# Altium PCB TPcape_basic.PcbDoc
Units mil, origin at the board's own origin, x right, y up, seen from the top; angles counter-clockwise.
Board outline 6000 x 4000 mil, 2 copper layers (Top Layer, Bottom Layer); 87 components, 99 nets, 432 pads, 8 vias.
Unrouted connection lines stored in the file: 245.
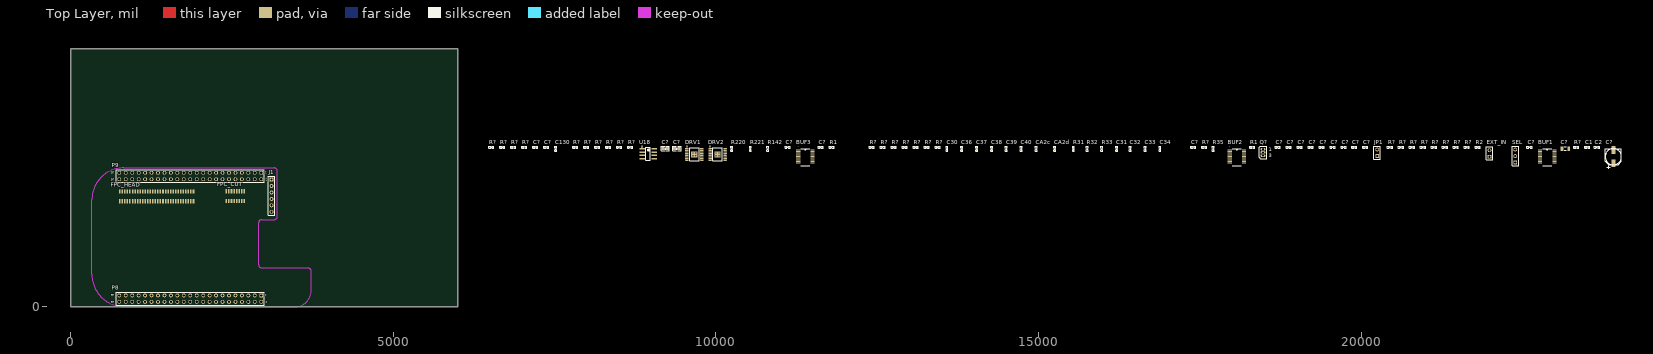
[diagram p0: Top Layer view]
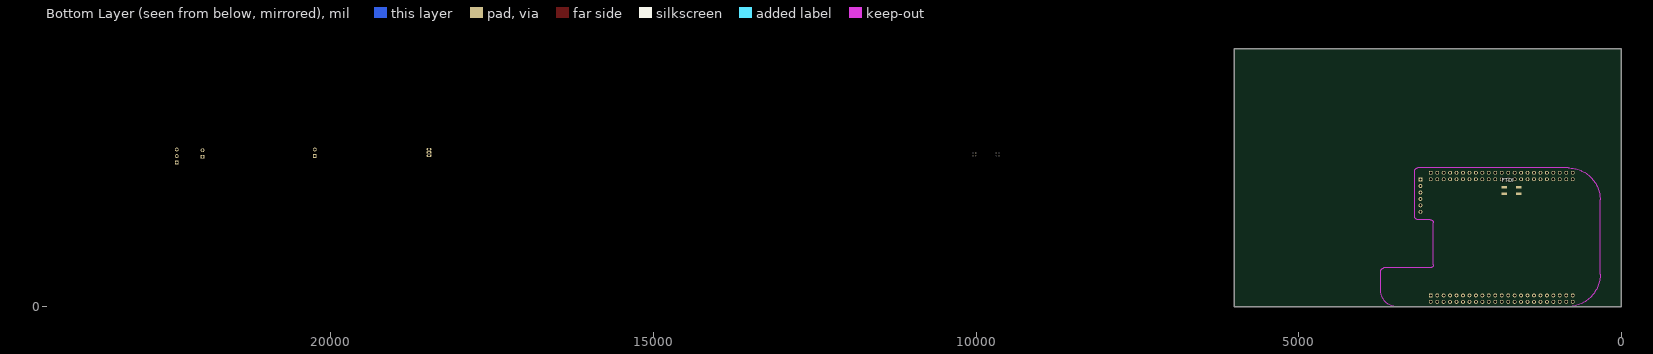
[diagram p1: Bottom Layer view, seen from below]

## Layer stack, top to bottom
Top Solder: solder mask 0.4, Solder Resist, Dk 3.5
Top Layer: signal copper 1.4
Dielectric1: dielectric 12.6, FR-4, Dk 4.8
Bottom Layer: signal copper 1.4
Bottom Solder: solder mask 0.4, Solder Resist, Dk 3.5

## Board outline
0,0 6000,0 6000,4000 0,4000

## Design rules (kind name [scope] priority, off if disabled: settings)
Clearance [All] p1: gap=10
PolygonConnect [All] p1: connectstyle=Relief reliefconductorwidth=10 reliefentries=4 polygonreliefangle="90 Angle" airgapwidth=10
RoomDefinition TPcape_basic [InComponentClass('TPcape_basic')] p1: confinementstyle=ConfineIn formatcopy=TRUE lockcomponents=FALSE outline -555,-145 24825,-145 24825,4345 -555,4345
RoutingVias [All] p1: holewidth=28 width=50 viastyle="Through Hole" minholewidth=28 minwidth=50 maxholewidth=28 maxwidth=50
SilkToSolderMaskClearance SilkscreenOverComponentPads [IsPad] p1: minsilkscreentomaskgap=10 clearancetoexposedcopper=TRUE
SolderMaskExpansion [All] p1: expansion=4
UnpouredPolygon [All] p1: allowunpoured=FALSE
Width [All] p1: maxlimit=10 minlimit=10 preferedwidth=10
28 further rules are at their usual default settings.

## Classes and differential pairs
component class TPcape_basic: BUF1 BUF2 BUF3 C1 C2 C30 C31 C32 C33 C34 C36 C37 C38 C39 C40 C130 C? CA2c CA2d DRV1 DRV2 EXT_IN FPC_CUT FPC_HEAD FTDI J1 JP1 P8 P9 Q? R1 R2 R31 R32 R33 R35 R142 R220 R221 R? SEL U18

## Components (designator, comment, footprint, x,y, rotation, side; value= is the part's Value field where it differs from the comment)
BUF1 "SN74LVC244A_PW_2" PW20 22880,2315 r0 top
BUF2 "SN74LVC244A_PW_2" PW20 18070,2315 r0 top
BUF3 "SN74LVC244A_PW_2" PW20 11385,2315 r0 top
C1 "0.1uF, 16V" 402 23500,2470 r0 top
C2 "0.1uF, 16V" 402 23650,2470 r0 top
C30 "No Comment" 402 13580,2445 r90 top
C31 "No Comment" 402 16210,2445 r90 top
C32 "No Comment" 402 16420,2445 r90 top
C33 "No Comment" 402 16650,2445 r90 top
C34 "No Comment" 402 16880,2445 r90 top
C36 "No Comment" 402 13810,2445 r90 top
C37 "No Comment" 402 14040,2445 r90 top
C38 "No Comment" 402 14270,2445 r90 top
C39 "No Comment" 402 14500,2445 r90 top
C40 "No Comment" 402 14730,2445 r90 top
C130 "0.1uF" 402 7515,2445 r90 top
C? "1000pF" 402 19385,2470 r0 top
C? "47uF" C1206 23160,2450 r0 top
C? "100uF" RD205SMD_250D 23905,2325 r90 top
C? "2.2uF, 6.3V" 402 7200,2470 r0 top
C? "10uF, 10V" 805 9215,2450 r0 top
C? "2.2uF, 6.3V" 402 7370,2470 r0 top
C? "10uF, 10V" 805 9395,2450 r0 top
C? "0.1uF" 402 22605,2470 r0 top
C? "0.1uF" 402 17395,2470 r0 top
C? "0.1uF" 402 11110,2470 r0 top
C? "1000pF" 402 19555,2470 r0 top
C? "1000pF" 402 19725,2470 r0 top
C? "1000pF" 402 19890,2470 r0 top
C? "1000pF" 402 20060,2470 r0 top
C? "1000pF" 402 18705,2470 r0 top
C? "1000pF" 402 18875,2470 r0 top
C? "1000pF" 402 19045,2470 r0 top
C? "1000pF" 402 19215,2470 r0 top
C? "0.1uF, 16V" 402 11625,2470 r0 top
CA2c "No Comment" 402 14960,2445 r90 top
CA2d "No Comment" 402 15250,2445 r90 top
DRV1 "DRV8833CPWPR" DRV8833CPWPR 9665,2360 r0 top
DRV2 "DRV8833CPWPR" DRV8833CPWPR 10025,2360 r0 top
EXT_IN "Header 2" HDR1X2 21985,2325 r90 top
FPC_CUT "Molex 52610-0872" "Molex 52610-0872" 2415,1640 r0 top
FPC_HEAD "Molex 52610-3072" "Molex 52610-3072" 1905,1785 r180 top
FTDI "Header 2X2" SSM-102-S-DV 1815,1850 r270 bottom
J1 "Header 6" HDR1X6 3115,1970 r270 top
JP1 "Header 2" HDR1X2 20245,2335 r90 top
P8 "FEMALE HEADER 2x23" HDR2x23 1855,125 r180 top
P9 "FEMALE HEADER 2x23" HDR2X23 1855,2025 r180 top
Q? "MOSFET-N" E3 18475,2390 r0 top
R1 "0" 402 18310,2470 r0 top
R1 "0" 402 11795,2470 r0 top
R2 "0" 402 21805,2470 r0 top
R31 "10k, 1%" 402 15540,2445 r90 top
R32 "10k, 1%" 402 15750,2445 r90 top
R33 "10k, 1%" 402 15980,2445 r90 top
R35 "10k, 1%" 402 17705,2445 r90 top
R142 "4.75k" 402 10805,2445 r90 top
R220 "5.6k" 402 10245,2445 r90 top
R221 "5.6k" 402 10535,2445 r90 top
R? "10k" 402 12415,2470 r0 top
R? "10k" 402 7990,2470 r0 top
R? "10k" 402 7820,2470 r0 top
R? "0.2" 402 6690,2470 r0 top
R? "0.2" 402 6520,2470 r0 top
R? "10k" 402 8330,2470 r0 top
R? "20k" 402 8160,2470 r0 top
R? "0.2" 402 7030,2470 r0 top
R? "0.2" 402 6860,2470 r0 top
R? "10k" 402 8670,2470 r0 top
R? "20k" 402 8500,2470 r0 top
R? "10k" 402 23330,2470 r0 top
R? "10k" 402 21635,2470 r0 top
R? "10k" 402 21465,2470 r0 top
R? "10k" 402 21295,2470 r0 top
R? "10k" 402 21125,2470 r0 top
R? "10k" 402 20955,2470 r0 top
R? "10k" 402 20785,2470 r0 top
R? "10k" 402 20615,2470 r0 top
R? "10k" 402 20445,2470 r0 top
R? "10k" 402 13435,2470 r0 top
R? "10k" 402 17565,2470 r0 top
R? "10k" 402 13265,2470 r0 top
R? "10k" 402 13095,2470 r0 top
R? "10k" 402 12925,2470 r0 top
R? "10k" 402 12755,2470 r0 top
R? "10k" 402 12585,2470 r0 top
SEL "Header 3" HDR1X3 22385,2235 r90 top
U18 "CAT24C256WI-GT3" CAT24C256WI-GT3 8950,2370 r0 top

## Footprints (in the part's own frame and the unit in brackets; to place one, negate y for a bottom-side part, rotate by r counter-clockwise, add the part's x,y. Pads: shape width x height; smd on the part's side, far side on the other; paste and mask are expansions set on the pad)
402 [mil] "402"
  rect 25x20 smd mask+2: 1(-20,0) 2(20,0)
  silkscreen extent -40,-15 40,15
805 [mil] "805"
  rect 45x50 smd mask+2: 1(-35,0) 2(35,0)
  silkscreen extent -65,-35 65,35
C1206 [mm] "Chip Capacitor, Body 3.2x1.6mm, IPC High Density"
  rect 1.1x1.7 smd: 1(-1.35,0) 2(1.35,0)
  silkscreen extent -0.4,-0.75 0.4,0.75, body extent -1.7,-0.9 1.7,0.9, height 1.3
CAT24C256WI-GT3 [mm] "IC EEPROM 256KBIT 400KHZ 8SOIC"
  rect 2.2x0.6 smd: 1(-2.4,1.905) 2(-2.4,0.635) 3(-2.4,-0.635) 4(-2.4,-1.905) 5(2.4,-1.905) 6(2.4,-0.635) 7(2.4,0.635) 8(2.4,1.905)
  silkscreen extent -2.52,-2.5 0.9,2.88, body extent -2,-2.5 2,2.5, height 1.75
DRV8833CPWPR [mm] "HTSSOP (PWP) for DRV8833C 1A Low Voltage Stepper or Single/Dual Brushed DC Motor Driver (PWM Ctrl)"
  oval 1.4x0.45 smd: 1(-2.95,2.275) 2(-2.95,1.625) 3(-2.95,0.975) 4(-2.95,0.325) 5(-2.95,-0.325) 6(-2.95,-0.975) 7(-2.95,-1.625) 8(-2.95,-2.275) 9(2.95,-2.275) 10(2.95,-1.625) 11(2.95,-0.975) 12(2.95,-0.325) 13(2.95,0.325) 14(2.95,0.975) 15(2.95,1.625) 16(2.95,2.275)
  rect 2.46x2.31 smd: 17(0,0)
  silkscreen extent -3.07,-2.55 1.85,3.17, body extent -3.21,-2.5 3.21,2.5, height 0.99
E3 [mm] "TO, Flat Index; 3 In-Line, Axial Leads; Body Dia. 4.6mm; Lead Dia. 0.5 mm (max)"
  oval 2x1 hole 0.8: 1(0,1.27) 2(0,0) 3(0,-1.27)
  silkscreen extent -1.41,-2.41 1.41,2.41
HDR1X2 [mm] "Connector; Header; 2 Position"
  rect 1.5x1.5 hole 0.9: 1(0,0)
  round 1.5 hole 0.9: 2(2.54,0)
  silkscreen extent -1.27,-1.27 3.81,1.27
HDR1X3 [mm] "Connector; Header; 3 Position"
  rect 1.5x1.5 hole 0.9: 1(0,0)
  round 1.5 hole 0.9: 2(2.54,0) 3(5.08,0)
  silkscreen extent -1.27,-1.27 6.35,1.27
HDR1X6 [mm] "Connector; Header; 6 Position"
  rect 1.5x1.5 hole 0.9: 1(0,0)
  round 1.5 hole 0.9: 2(2.54,0) 3(5.08,0) 4(7.62,0) 5(10.16,0) 6(12.7,0)
  silkscreen extent -1.27,-1.27 13.97,1.27
HDR2x23 [mm]
  rect 1.5x1.5 hole 0.9: 1(-27.94,-1.27)
  round 1.5 hole 0.9: 2(-27.94,1.27) 3(-25.4,-1.27) 4(-25.4,1.27) 5(-22.86,-1.27) 6(-22.86,1.27) 7(-20.32,-1.27) 8(-20.32,1.27) 9(-17.78,-1.27) 10(-17.78,1.27) 11(-15.24,-1.27) 12(-15.24,1.27) 13(-12.7,-1.27) 14(-12.7,1.27) 15(-10.16,-1.27) 16(-10.16,1.27) 17(-7.62,-1.27) 18(-7.62,1.27) 19(-5.08,-1.27) 20(-5.08,1.27) 21(-2.54,-1.27) 22(-2.54,1.27) 23(0,-1.27) 24(0,1.27) 25(2.54,-1.27) 26(2.54,1.27) 27(5.08,-1.27) 28(5.08,1.27) 29(7.62,-1.27) 30(7.62,1.27) 31(10.16,-1.27) 32(10.16,1.27) 33(12.7,-1.27) 34(12.7,1.27) 35(15.24,-1.27) 36(15.24,1.27) 37(17.78,-1.27) 38(17.78,1.27) 39(20.32,-1.27) 40(20.32,1.27) 41(22.86,-1.27) 42(22.86,1.27) 43(25.4,-1.27) 44(25.4,1.27) 45(27.94,-1.27) 46(27.94,1.27)
  silkscreen extent -29.21,-2.54 29.21,2.54
HDR2X23 [mm]
  rect 1.5x1.5 hole 0.9: 1(-27.94,-1.27)
  round 1.5 hole 0.9: 2(-27.94,1.27) 3(-25.4,-1.27) 4(-25.4,1.27) 5(-22.86,-1.27) 6(-22.86,1.27) 7(-20.32,-1.27) 8(-20.32,1.27) 9(-17.78,-1.27) 10(-17.78,1.27) 11(-15.24,-1.27) 12(-15.24,1.27) 13(-12.7,-1.27) 14(-12.7,1.27) 15(-10.16,-1.27) 16(-10.16,1.27) 17(-7.62,-1.27) 18(-7.62,1.27) 19(-5.08,-1.27) 20(-5.08,1.27) 21(-2.54,-1.27) 22(-2.54,1.27) 23(0,-1.27) 24(0,1.27) 25(2.54,-1.27) 26(2.54,1.27) 27(5.08,-1.27) 28(5.08,1.27) 29(7.62,-1.27) 30(7.62,1.27) 31(10.16,-1.27) 32(10.16,1.27) 33(12.7,-1.27) 34(12.7,1.27) 35(15.24,-1.27) 36(15.24,1.27) 37(17.78,-1.27) 38(17.78,1.27) 39(20.32,-1.27) 40(20.32,1.27) 41(22.86,-1.27) 42(22.86,1.27) 43(25.4,-1.27) 44(25.4,1.27) 45(27.94,-1.27) 46(27.94,1.27)
  silkscreen extent -29.21,-2.54 29.21,2.54
"Molex 52610-0872" [mm] "FPC connector for Fujitsu FTP-628MCL401 (Molex 52610-0871 is obsolete)"
  rect 0.6x1.65 smd: 1(0,0) 1(0,3.8) 2(1,0) 2(1,3.8) 3(2,0) 3(2,3.8) 4(3,0) 4(3,3.8) 5(4,0) 5(4,3.8) 6(5,0) 6(5,3.8) 7(6,0) 7(6,3.8) 8(7,0) 8(7,3.8)
  body extent -3.81,-0.34 10.79,4.15, height 5.7
"Molex 52610-3072" [mm] "FPC connector for Fujitsu FTP-628MCL401 print head (Molex 52610-3071 is obsolete)"
  rect 0.6x1.65 smd: 1(0,3.8) 1(0,0) 2(1,3.8) 2(1,0) 3(2,3.8) 3(2,0) 4(3,3.8) 4(3,0) 5(4,3.8) 5(4,0) 6(5,3.8) 6(5,0) 7(6,3.8) 7(6,0) 8(7,0) 8(7,3.8) 9(8,0) 9(8,3.8) 10(9,0) 10(9,3.8) 11(10,0) 11(10,3.8) 12(11,0) 12(11,3.8) 13(12,0) 13(12,3.8) 14(13,0) 14(13,3.8) 15(14,0) 15(14,3.8) 16(15,0) 16(15,3.8) 17(16,0) 17(16,3.8) 18(17,0) 18(17,3.8) 19(18,0) 19(18,3.8) 20(19,0) 20(19,3.8) 21(20,0) 21(20,3.8) 22(21,0) 22(21,3.8) 23(22,0) 23(22,3.8) 24(23,0) 24(23,3.8) 25(24,0) 25(24,3.8) 26(25,0) 26(25,3.8) 27(26,0) 27(26,3.8) 28(27,0) 28(27,3.8) 29(28,0) 29(28,3.8) 30(29,0) 30(29,3.8)
  body extent -3.8,-0.45 32.8,4.05, height 5.7
PW20 [mil]
  rect 66x14 smd: 1(-111,115.16) 2(-111,89.57) 3(-111,63.98) 4(-111,38.39) 5(-111,12.8) 6(-111,-12.8) 7(-111,-38.39) 8(-111,-63.98) 9(-111,-89.57) 10(-111,-115.16) 11(111,-115.16) 12(111,-89.57) 13(111,-63.98) 14(111,-38.39) 15(111,-12.8) 16(111,12.8) 17(111,38.39) 18(111,63.98) 19(111,89.57) 20(111,115.16)
  silkscreen extent -68,-130 68,130, body extent -126,-128 126,128, height 38
RD205SMD_250D [mil] "RD205SMD_250D"
  rect 120x65 smd mask+2: 1(-102.5,0) 2(102.5,0)
  silkscreen extent -188,-125 125,125
SSM-102-S-DV [mm] "4-pin 0.1\" recepticle, surface mount for FTDI"
  rect 1.02x2.22 smd: 1(0,0) 2(0,5.65) 3(2.54,0) 4(2.54,5.65)
  body extent -1.27,-0.67 3.81,6.36, height 7.37

## Part data
BUF1 BUF2 BUF3 DRV1 DRV2: "Imported"
C1 C2 C30 C31 C32 C33 C34 C36 C37 C38 C39 C40 C130 C? C? C? C? C? C? C? C? C? C? C? C? C? C? C? CA2c CA2d: library part "CAP SMD", "No Description"
C?: library part "Cap Semi", "Capacitor (Semiconductor SIM Model)"
C?: library part "CAP SMD", "Bulk capacitor for motor drive"
C? C?: library part "CAP SMD", "Low-ESR ceramic bypass capacitor"
EXT_IN JP1: "Header, 2-Pin"
FPC_CUT: "FPC connector for Fujitsu FTP-628MCL401 (Molex 52610-0871 is obsolete)"
FPC_HEAD: "FPC connector for Fujitsu FTP-628MCL401 print head (Molex 52610-3071 is obsolete)"
FTDI: "Header, 2-Pin, Dual row"
J1: "Header, 6-Pin"
P8 P9: library part HDR_46_F_2_0.1_0.1, "CONN HEADER FMAL 46PS.1\" DL GOLD"
Q?: "N-Channel MOSFET"
R1 R1 R2 R31 R32 R33 R35 R? R? R? R? R? R? R? R? R? R? R? R? R? R? R? R? R? R? R? R? R? R? R? R? R? R? R?: library part "RES SMD", "RES 10K OHM 1/16W 5% 0402 SMD"
R142 R220 R221: library part "RES SMD", "RES 5.6K OHM 1/16W 5% 0402 SMD"
SEL: "Header, 3-Pin"
U18: "IC EEPROM 256KBIT 400KHZ 8SOIC"

## Via types
v1: diameter 19.68, hole 7.87, Top Layer to Bottom Layer, 8 vias

## Nets (pads, with @x,y where several pads share a name; then routed paths per layer and width w, separated by ;. In a path a pad name is that pad's centre, name@x,y a point inside that pad or via, vN(x,y) a via of type N, cw(c..) or ccw(c..) an arc to the next point about the centre after c; other vN are vias at no path point)
AIN0: P9.39
AIN1: P9.40
AIN2: P9.37
AIN3: P9.38
AIN4: P9.33
AIN5: P9.36
AIN6: P9.35
B_UART0_RX: FTDI.1 FTDI.3 J1.4
B_UART0_TX: FTDI.2 FTDI.4 J1.5
CLOCK: BUF3.16 C?.2@18725,2470 FPC_HEAD.7 R?.1@7970,2470
DATA_IN: BUF3.18 C?.2@18895,2470 FPC_HEAD.6 R?.1@7800,2470
DATA_OUT: BUF2.17 R2.1
EXT_PWR: EXT_IN.1 SEL.3
FAULTN_CUT: BUF3.8 DRV2.8 R?.2@8690,2470
FAULTN_HEAD: BUF3.6 DRV1.8 R?.2@8350,2470
GND: BUF1.10 BUF2.10 BUF3.10 BUF3.11 BUF3.13 BUF3.15 BUF3.17 C1.1 C2.1 C130.2 C?.1@9180,2450 C?.1@9360,2450 C?.1@11090,2470 C?.1@11605,2470 C?.1@17375,2470 C?.1@18685,2470 C?.1@18855,2470 C?.1@19025,2470 C?.1@19195,2470 C?.1@19365,2470 C?.1@19535,2470 C?.1@19705,2470 C?.1@19870,2470 C?.1@20040,2470 C?.1@22585,2470 C?.1@23106.85,2450 C?.1@23905,2222.5 C?.2@7220,2470 C?.2@7390,2470 DRV1.13 DRV1.17 DRV2.13 DRV2.17 EXT_IN.2 FPC_HEAD.8 FPC_HEAD.9 FPC_HEAD.19 FPC_HEAD.20 J1.1 P8.1 P8.2 P9.1 P9.2 P9.43 P9.44 P9.45 P9.46 R35.2 R?.2@6540,2470 R?.2@6710,2470 R?.2@6880,2470 R?.2@7050,2470 R?.2@7840,2470 R?.2@8010,2470 R?.2@12435,2470 R?.2@12605,2470 R?.2@12775,2470 R?.2@12945,2470 R?.2@13115,2470 R?.2@13285,2470 R?.2@13455,2470 R?.2@20465,2470 R?.2@20635,2470 R?.2@20805,2470 R?.2@20975,2470 R?.2@21145,2470 R?.2@21315,2470 R?.2@21485,2470 R?.2@21655,2470 U18.1 U18.2 U18.4
  other v1: 9643.35,2338.35 9686.65,2338.35 10003.35,2338.35 10046.65,2338.35 9643.35,2381.65 9686.65,2381.65 10003.35,2381.65 10046.65,2381.65
GNDA_ADC: P9.34
I2C2_SCL: P9.19 R220.1 U18.6
I2C2_SDA: P9.20 R221.1 U18.5
LATCHN: BUF2.5 C?.2@19065,2470 FPC_HEAD.21 R?.2@17585,2470
LCD_AC_BIAS_EN: P8.30
LCD_DATA8: P8.37
LCD_DATA9: P8.38
LCD_DATA10: P8.36
LCD_DATA11: P8.34
LCD_DATA12: P8.35
LCD_DATA13: P8.33
LCD_DATA14: P8.31
LCD_DATA15: P8.32
LCD_HSYNC: P8.29
LCD_PCLK: P8.28
LCD_VSYNC: P8.27
MTA_1: BUF1.18 DRV1.16 R?.1@20425,2470
MTA_2: BUF1.9 DRV2.16 R?.1@21105,2470
MTA_CUT: DRV2.2 FPC_CUT.4
MTA_HEAD: DRV1.2 FPC_HEAD.28
MTAN_1: BUF1.16 DRV1.15 R?.1@20595,2470
MTAN_2: BUF1.7 DRV2.15 R?.1@21275,2470
MTAN_CUT: DRV2.4 FPC_CUT.5
MTAN_HEAD: DRV1.4 FPC_HEAD.27
MTB_1: BUF1.14 DRV1.9 R?.1@20765,2470
MTB_2: BUF1.5 DRV2.9 R?.1@21445,2470
MTB_CUT: DRV2.7 FPC_CUT.6
MTB_HEAD: DRV1.7 FPC_HEAD.30
MTBN_1: BUF1.12 DRV1.10 R?.1@20935,2470
MTBN_2: BUF1.3 DRV2.10 R?.1@21615,2470
MTBN_CUT: DRV2.5 FPC_CUT.7
MTBN_HEAD: DRV1.5 FPC_HEAD.29
NetC?_1: C?.1@7350,2470 DRV2.14
NetDRV1_1: DRV1.1 R?.2@8180,2470
NetDRV1_3: DRV1.3 R?.1@6500,2470
NetDRV1_6: DRV1.6 R?.1@6670,2470
NetDRV2_1: DRV2.1 R?.2@8520,2470
NetDRV2_3: DRV2.3 R?.1@6840,2470
NetDRV2_6: DRV2.6 R?.1@7010,2470
NetFPC_CUT_1: FPC_CUT.1 R1.1@11775,2470
NetFPC_HEAD_1: FPC_HEAD.1 R35.1
NetFPC_HEAD_2: FPC_HEAD.2 R1.1@18290,2470
NetFPC_HEAD_22: FPC_HEAD.22 R2.2
NetR142_1: R142.1 U18.3
PRU0_R30_0: BUF2.2 P9.31
PRU0_R30_1: BUF2.4 P9.29
PRU0_R30_2: BUF2.6 P9.30
PRU0_R30_3: BUF2.8 P9.28
PRU0_R30_4: BUF2.11 P9.42
PRU0_R30_5: BUF2.13 P9.27
PRU0_R30_6: BUF3.2
PRU0_R30_7: BUF2.15 P9.25
PRU0_R30_14: BUF3.4 P8.12
PRU0_R31_15: BUF3.9 P8.15
PRU0_R31_16: BUF2.3 P9.24 R?.1@13415,2470
PRU1_R30_0: BUF1.2 P8.45
PRU1_R30_1: BUF1.4 P8.46
PRU1_R30_2: BUF1.6 P8.43
PRU1_R30_3: BUF1.8 P8.44
PRU1_R30_4: BUF1.11 P8.41
PRU1_R30_5: BUF1.13 P8.42
PRU1_R30_6: BUF1.15 P8.39
PRU1_R30_7: BUF1.17 P8.40
PRU1_R30_12: BUF1.1 BUF1.19 BUF2.1 BUF2.19 BUF3.1 BUF3.19 P8.21 R?.2@23350,2470
PRU1_R31_13: BUF3.14 P8.20
PRU1_R31_16: BUF3.12 P9.26
STROBE1: BUF2.18 C?.2@19235,2470 FPC_HEAD.18 R?.1@12395,2470
STROBE2: BUF2.16 C?.2@19405,2470 FPC_HEAD.17 R?.1@12565,2470
STROBE3: BUF2.14 C?.2@19575,2470 FPC_HEAD.16 R?.1@12735,2470
STROBE4: BUF2.12 C?.2@19745,2470 FPC_HEAD.12 R?.1@12905,2470
STROBE5: BUF2.9 C?.2@19910,2470 FPC_HEAD.11 R?.1@13075,2470
STROBE6: BUF2.7 C?.2@20080,2470 FPC_HEAD.10 R?.1@13245,2470
SW: FPC_HEAD.26
SWN: FPC_HEAD.25
SYS_RESETN: P9.10
TIMER4: P8.7
TM_1: FPC_HEAD.14
TM_2: FPC_HEAD.15
VCC: R?.1@8310,2470 R?.1@8650,2470
VDD: C2.2 C?.2@11645,2470 C?.2@23213.15,2450 FPC_HEAD.13 R1.2
VDD_3V3: BUF1.20 BUF2.20 BUF3.20 C130.1 C?.2@11130,2470 C?.2@17415,2470 C?.2@22625,2470 P9.3 P9.4 R142.2 R220.2 R221.2 R?.1@17545,2470 R?.1@23310,2470 U18.8
VDD_5V: P9.5 P9.6 SEL.1
VH: C1.2 C?.2@9250,2450 C?.2@9430,2450 C?.2@23905,2427.5 DRV1.12 DRV2.12 FPC_HEAD.4 FPC_HEAD.5 FPC_HEAD.23 FPC_HEAD.24 Q?.1 R?.1@8140,2470 R?.1@8480,2470 SEL.2
pads on no net: BUF3.3 BUF3.5 BUF3.7 C30.1 C30.2 C31.1 C31.2 C32.1 C32.2 C33.1 C33.2 C34.1 C34.2 C36.1 C36.2 C37.1 C37.2 C38.1 C38.2 C39.1 C39.2 C40.1 C40.2 C?.1@7180,2470 CA2c.1 CA2c.2 CA2d.1 CA2d.2 DRV1.11 DRV1.14 DRV2.11 FPC_CUT.2 FPC_CUT.3 FPC_CUT.8 FPC_HEAD.3 J1.2 J1.3 J1.6 JP1.1 JP1.2 P8.3 P8.4 P8.5 P8.6 P8.8 P8.9 P8.10 P8.11 P8.13 P8.14 P8.16 P8.17 P8.18 P8.19 P8.22 P8.23 P8.24 P8.25 P8.26 P9.7 P9.8 P9.9 P9.11 P9.12 P9.13 P9.14 P9.15 P9.16 P9.17 P9.18 P9.21 P9.22 P9.23 P9.32 P9.41 Q?.2 Q?.3 R31.1 R31.2 R32.1 R32.2 R33.1 R33.2 U18.7

## Keep-outs
Keep-Out Layer:
  lines w10: 329.99,1657.5 cw(c822.5,1657.5) 822.5,2150.01 ; 330,1660 330,505 ccw(c835,505) 835,0 3480,0 ccw(c3480,250) 3730,250 3730,550 ccw(c3680,550) 3680,600 3620,600 2970,600 2965,600 cw(c2965,650) 2915,650 2915,670 2915,1285 2915,1300 cw(c2965,1300) 2965,1350 2995,1350 3145,1350 3155,1350 ccw(c3155,1400) 3205,1400 3205,1430 3205,1550 3205,2025 3205,2100 ccw(c3155,2100) 3155,2150 3080,2150 825,2150

## Text inside footprints (layer, text, board x,y; h text height)
P8: Top Overlay "2" at 3045,85 h25 r180; Top Overlay "1" at 3040,190 h25 r180; Top Overlay "46" at 680,85 h25 r180; Top Overlay "45" at 680,190 h25 r180
P9: Top Overlay "2" at 3045,1985 h25 r180; Top Overlay "1" at 3040,2090 h25 r180; Top Overlay "46" at 680,1985 h25 r180; Top Overlay "45" at 680,2090 h25 r180
Q?: Top Overlay "1" at 18564.57,2411.85 h59.05; Top Overlay "3" at 18564.57,2312.72 h59.05